# Altium PCB nrf52810_caaa_dcdc.PcbDoc
Units mil, origin at the board's own origin, x right, y up, seen from the top; angles counter-clockwise.
Board outline 374.02 x 344.49 mil, 4 copper layers (Top Layer, Mid-Layer 1, Mid-Layer 2, Bottom Layer), stack 62.97 mil thick; 17 components, 29 nets, 77 pads, 35 vias.
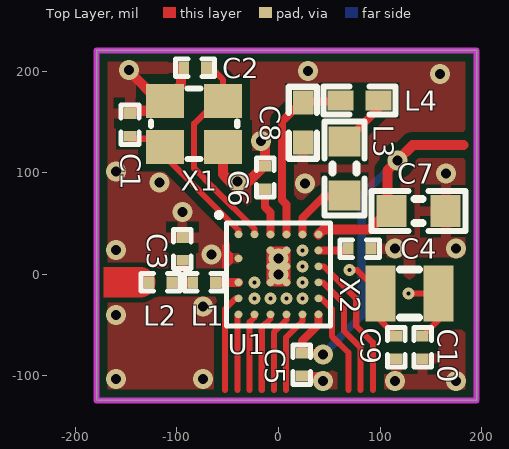
[diagram p0: Top Layer view]
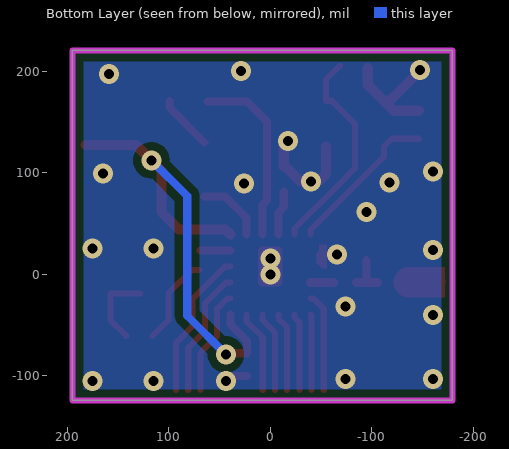
[diagram p1: Bottom Layer view, seen from below]
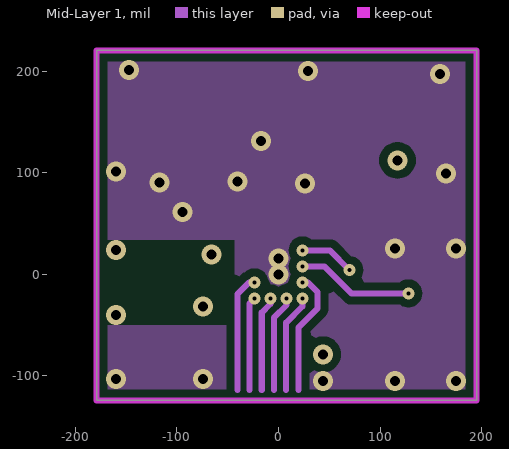
[diagram p2: Mid-Layer 1]
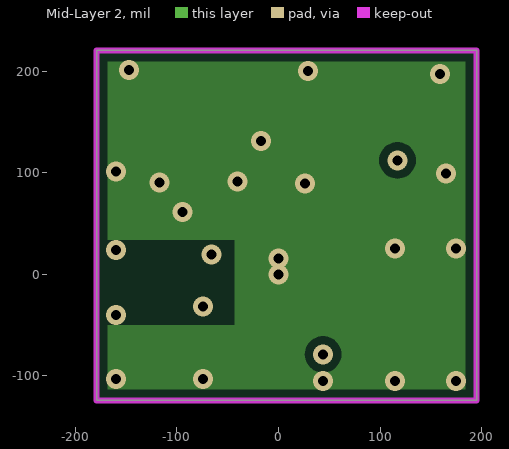
[diagram p3: Mid-Layer 2]
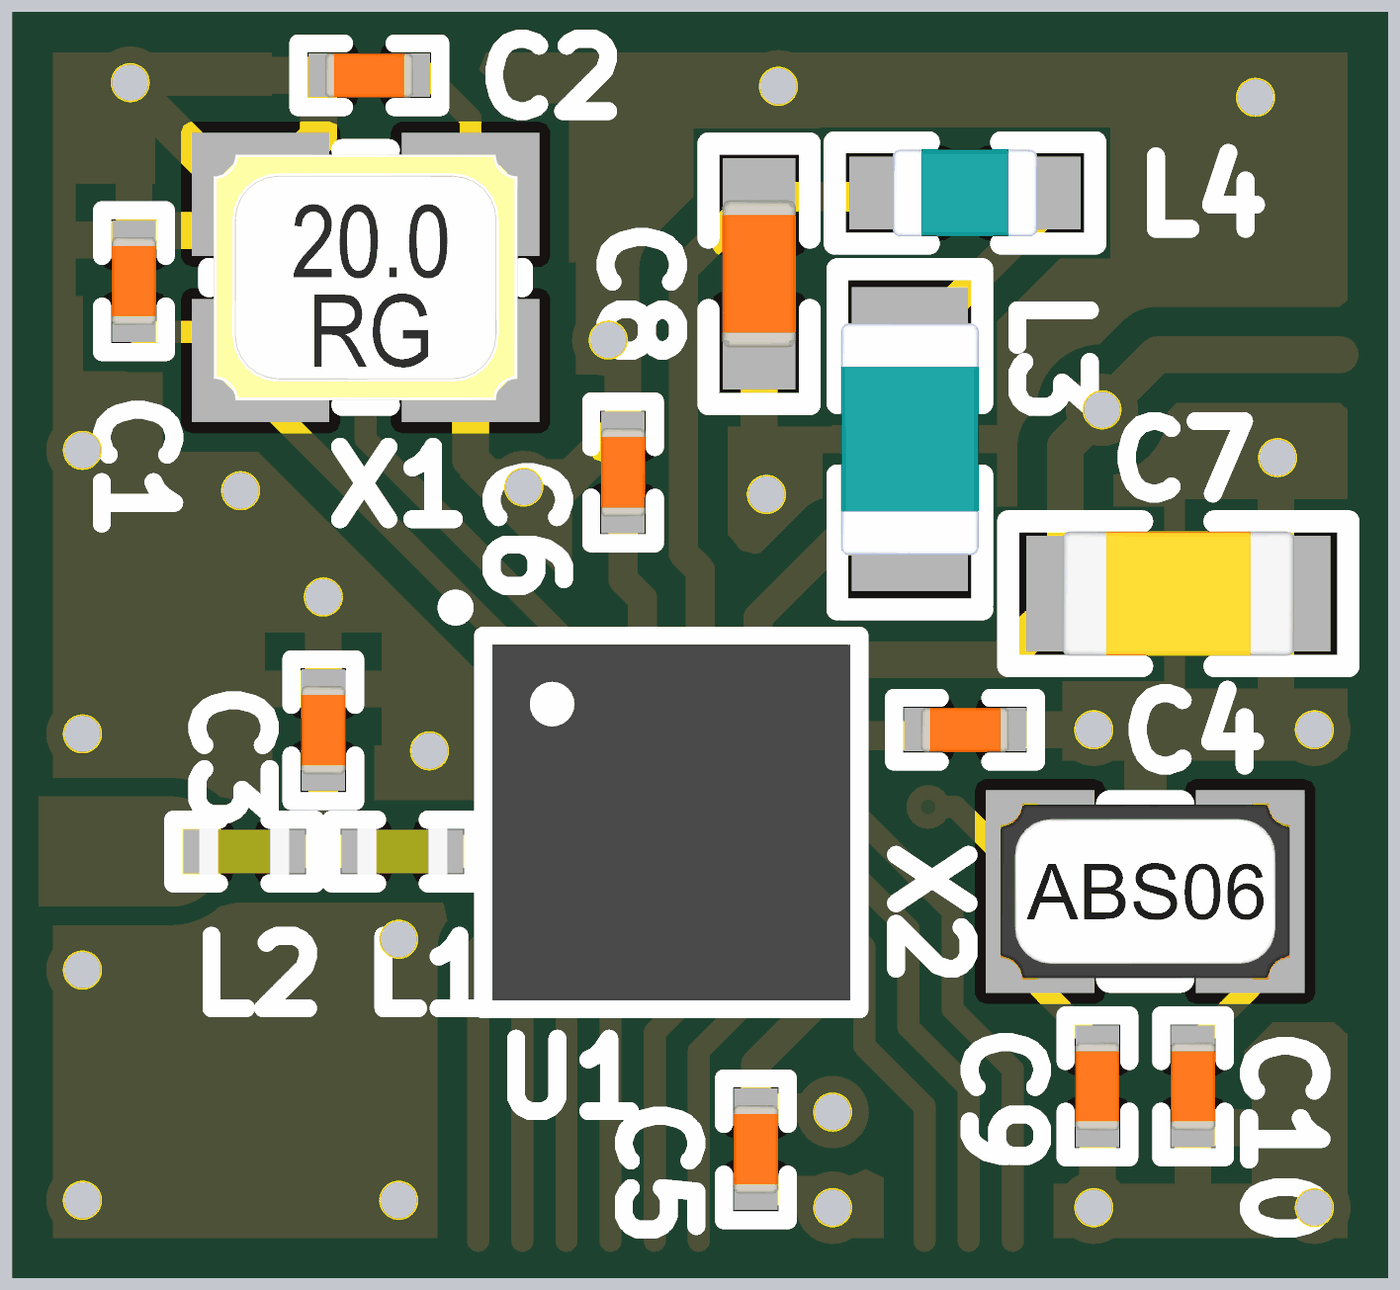
[diagram p4: 3D render of the assembled board from above, using the file's embedded part models]

## Layer stack, top to bottom
Top Solder: solder mask 0.4, Solder Resist, Dk 3.5
Top Layer: signal copper 1.4
Dielectric1: core 9, FR-4, Dk 4.8
Mid-Layer 1: signal copper 1.4
Dielectric2: prepreg 39.3701, FR-4, Dk 4.8
Mid-Layer 2: signal copper 1.4
Dielectric3: core 9, FR-4, Dk 4.8
Bottom Layer: signal copper 1.4
Bottom Solder: solder mask 0.4, Solder Resist, Dk 3.5

## Board outline
-179.13,-124.02 194.88,-124.02 194.88,220.47 -179.13,220.47

## Design rules (kind name [scope] priority, off if disabled: settings)
Clearance Polygon_ANT [(InNamedPolygon('Top_Layer-GND')) or (InNamedPolygon('Bottom_Layer-GND')) vs InNet('RF')] p1: gap=5 ignorepadtopadclearanceinfootprint=FALSE except(0: Arc-Hole Track-Hole SMDPad-Hole THPad-Hole Via-Hole Fill-Hole Poly-Hole Region-Hole Text-Hole)
Clearance Polygon [(InNamedPolygon('Top_Layer-GND')) or (InNamedPolygon('Bottom_Layer-GND')) or (InNamedPolygon('Mid_Layer_1-GND')) or (InNamedPolygon('Mid_Layer_2-GND'))] p2: gap=8 ignorepadtopadclearanceinfootprint=FALSE except(0: Arc-Hole Track-Hole SMDPad-Hole THPad-Hole Via-Hole Fill-Hole Poly-Hole Region-Hole Text-Hole)
Clearance [All] p3: gap=3.94 ignorepadtopadclearanceinfootprint=FALSE
ComponentClearance [All] p1 off: gap=10 collisioncheckmode=3 verticalgap=10 showdistances=FALSE
FabricationTestPointUsage TestPointUsage [All] p1: valid=0 allowmultiple=FALSE
FabricationTestpoint Testpoint [All] p1: side=3 testpointundercomponent=TRUE minsize=40 maxsize=100 preferedsize=60 minholesize=0 maxholesize=40 preferedholesize=32 testpointgrid=1 allowsidetop=TRUE allowsidebottom=TRUE usegrid=TRUE gridtolerance=0.01
Height [All] p1 off: minheight=0 maxheight=1000 prefheight=500
HoleSize [All] p1: absolutevalues=TRUE maxlimit=160 minlimit=3 maxpercent=80.000 minpercent=20.000
HoleToHoleClearance [All] p1 off: gap=3 allowstackedmicrovias=FALSE
MinimumAnnularRing [All] p1 off: minimumring=3.94
PolygonConnect PolygonConnect_1 [isVia and innet(gnd)] p1: connectstyle=Direct reliefconductorwidth=10 reliefentries=4 polygonreliefangle="90 Angle" airgapwidth=10
PolygonConnect [All] p2: connectstyle=Relief reliefconductorwidth=10 reliefentries=4 polygonreliefangle="90 Angle" airgapwidth=10
RoutingVias [All] p1: holewidth=16 width=32 viastyle="Through Hole" minholewidth=3.94 minwidth=9.84 maxholewidth=28 maxwidth=50
SilkToSolderMaskClearance SilkscreenOverComponentPads [IsPad] p1: minsilkscreentomaskgap=10 clearancetoexposedcopper=TRUE
SolderMaskExpansion [All] p1: expansion=3
Width [All] p1: maxlimit=100 minlimit=3 preferedwidth=6 minimp=50.000000 maximp=50.000000 favimp=50.000000
23 further rules are at their usual default settings.

## Components (designator, comment, footprint, x,y, rotation, side; value= is the part's Value field where it differs from the comment)
C1 "12pF" CAPC0603X03L_C -146.13,147.25 r270 top
C2 "12pF" CAPC0603X03L_C -82.13,203.25 r0 top
C3 "1.2pF" CAPC0603X03L_C -94.63,25.12 r270 top
C4 "100nF" CAPC0603X03L_C 79.87,25.25 r0 top
C5 "100nF" CAPC0603X03L_C 23,-88.87 r270 top
C6 "100pF" CAPC0603X03L_C -13.13,95.25 r270 top
C7 "4.7µF" CAPC1608X06L 137.87,62.25 r0 top
C8 "1.0µF" CAPC1005X04L 23.87,149.25 r90 top
C9 "12pF" CAPC0603X03L_C 115.87,-71.75 r90 top
C10 "12pF" CAPC0603X03L_C 141.87,-71.75 r90 top
L1 "2.2nH" INDC0603X03L_C -73.13,-7.87 r180 top
L2 "3.3nH" INDC0603X03L_C -116.13,-7.88 r180 top
L3 "10µH" INDC1608X06L 64.87,104.25 r270 top
L4 "15nH" INDC1005X04L 79.87,171.25 r0 top
U1 "nRF52810-CAAA" BGA33C40P6X6_247X246X50 0,0 r0 top
X1 "32MHz" BT-XTAL_2016 -83.13,148.25 r0 top
X2 "32.768kHz" XTAL_2012 128.87,-18.75 r0 top

## Footprints (in the part's own frame and the unit in brackets; to place one, negate y for a bottom-side part, rotate by r counter-clockwise, add the part's x,y. Pads: shape width x height; smd on the part's side, far side on the other; paste and mask are expansions set on the pad)
BGA33C40P6X6_247X246X50 [mm] "BGA, 33-Leads, Body 2.47x2.46mmx0.50mm, Pitch 0.40mm"
  round 0.194 smd mask+0.05: A1(-1,1) A2(-0.6,1) A3(-0.2,1) A4(0.2,1) A5(0.6,1) A6(1,1) B3(-0.2,0.6) B4(0.2,0.6) B5(0.6,0.6) B6(1,0.6) C1(-1,0.4) D3(-0.2,0.2) D4(0.2,0.2) D5(0.6,0.2) D6(1,0.2) E1(-1,-0.2) E2(-0.6,-0.2) E3(-0.2,-0.2) E4(0.2,-0.2) E5(0.6,-0.2) E6(1,-0.2) F1(-1,-0.6) F2(-0.6,-0.6) F3(-0.2,-0.6) F4(0.2,-0.6) F5(0.6,-0.6) F6(1,-0.6) G1(-1,-1) G2(-0.6,-1) G3(-0.2,-1) G4(0.2,-1) G5(0.6,-1) G6(1,-1)
  silkscreen extent -1.55,-1.29 1.3,1.55, body extent -1.23,-1.23 1.23,1.23, height 0.5
BT-XTAL_2016 [mm] "Crystal 2.0 x 1.6 mm"
  rect 0.95x0.85 smd: 1(-0.725,-0.575) 2(0.725,-0.575) 3(0.725,0.575) 4(-0.725,0.575)
  silkscreen extent -1.08,-0.88 1.08,0.88, body extent -1.05,-0.85 1.05,0.85, height 0.56
CAPC0603X03L_C [mm] "Chip Capacitor, 2-Leads, Body 0.6x0.3mm, IPC High Density"
  rect 0.27x0.3 smd: 1(-0.285,0) 2(0.285,0)
  silkscreen extent -0.49,-0.22 0.49,0.22, body extent -0.3,-0.15 0.31,0.15, height 0.3
CAPC1005X04L [mm] "Chip Capacitor, 2-Leads, Body 1.0x0.5mm, IPC High Density"
  rect 0.6x0.5 smd: 1(-0.5,0) 2(0.5,0)
  silkscreen extent -0.9,-0.35 0.9,0.35, body extent -0.51,-0.25 0.51,0.25, height 0.5
CAPC1608X06L [mm] "Chip Capacitor, 2-Leads, Body 1.6x0.8mm, IPC High Density"
  rect 0.75x0.8 smd: 1(-0.675,0) 2(0.675,0)
  silkscreen extent -1.17,-0.5 1.17,0.5, body extent -0.8,-0.43 0.8,0.43, height 0.8
INDC0603X03L_C [mm] "Chip Inductor, 2-Leads, Body 0.6x0.3mm, IPC High Density"
  rect 0.27x0.3 smd: 1(-0.285,0) 2(0.285,0)
  silkscreen extent -0.49,-0.22 0.49,0.22, body extent -0.31,-0.16 0.31,0.16, height 0.26
INDC1005X04L [mm] "Chip Inductor, 2-Leads, Body 1.0x0.5mm, IPC High Density"
  rect 0.65x0.5 smd: 1(-0.475,0) 2(0.475,0)
  silkscreen extent -0.9,-0.35 0.9,0.35, body extent -0.5,-0.3 0.5,0.3, height 0.5
INDC1608X06L [mm] "Chip Inductor, 2-Leads, Body 1.6x0.8mm, IPC High Density"
  rect 0.75x0.8 smd: 1(-0.675,0) 2(0.675,0)
  silkscreen extent -1.17,-0.5 1.17,0.5, body extent -0.8,-0.48 0.8,0.48, height 0.8
XTAL_2012 [mm] "XTAL SMD 2.0 x 1.2 mm"
  rect 0.75x1.4 smd: 1(-0.725,0) 2(0.725,0)
  silkscreen extent -0.24,-0.6 0.24,0.6, body extent -1,-0.61 1,0.61, height 0.6

## Part data
C1 C2 C9 C10: library part C0201-12p, "Capacitor, NP0, ±2%", Footprint Doc=0201, LatestRevisionDate=2017-11-09, Part Number=C0201-12p, Pin Count=2, Published=2014-11-13, Publisher="Nordic Semiconductor"
C3: library part C0201-1.2p, "Capacitor, NP0, ±5%", Footprint Doc=0201, LatestRevisionDate=2014-11-13, Part Number=C0201-1.2p, Pin Count=2, Published=2014-11-13, Publisher="Nordic Semiconductor"
C4 C5: library part C0201-100n, "Capacitor, X5R, ±10%", Footprint Doc=0201, LatestRevisionDate=2017-11-09, Part Number=C0201-100n, Pin Count=2, Published=2014-11-13, Publisher="Nordic Semiconductor"
C6: library part C0201-100p, "Capacitor, NP0, ±2%", Footprint Doc=0201, LatestRevisionDate=2017-11-09, Part Number=C0201-100p, Pin Count=2, Published=2014-11-13, Publisher="Nordic Semiconductor"
C7: library part C0603-4µ7, "Capacitor, X5R, ±10%", Footprint Doc=0603, LatestRevisionDate=2009-11-23, Part Number=C0603-4µ7, Pin Count=2, Published=2009-05-08, Publisher="Nordic Semiconductor"
C8: library part C0402-1µ0, "Capacitor, X5R, ±5%", Footprint Doc=0402, LatestRevisionDate=2016-08-22, Part Number=C0402-1µ0, Pin Count=2, Published=2009-05-08, Publisher="Nordic Semiconductor"
L1: library part L0201-2n2, "High frequency chip inductor ±5%", Footprint Doc=0201, LatestRevisionDate=2013-04-10, Part Number=L0201-2n2, Pin Count=2, Published=2013-04-10, Publisher="Nordic Semiconductor"
L2: library part L0201-3n3, "High frequency chip inductor ±5%", Footprint Doc=0201, LatestRevisionDate=2013-04-10, Part Number=L0201-3n3, Pin Count=2, Published=2013-04-10, Publisher="Nordic Semiconductor"
L3: library part L0603-10µ, "Chip inductor, IDC,min = 50 mA, ±20%", Footprint Doc=0603, LatestRevisionDate=2012-09-19, Part Number=L0603-10µ, Pin Count=2, Published=2010-02-24, Publisher="Nordic Semiconductor"
L4: library part L0402-15n, "High frequency chip inductor ±10%", Footprint Doc=0402, LatestRevisionDate=2012-09-19, Part Number=L0402-15n, Pin Count=2, Published=2010-07-12, Publisher="Nordic Semiconductor"
U1: "Multi-protocol Bluetooth Low Energy, ANT and 2.4GHz proprietary system-on-chip", Manufacturer="Nordic Semiconductor", Footprint Doc=WLCSP-33, LatestRevisionDate=2017-02-07, Manufacturer Part Number=nRF52810-CAAA, Part Number=nRF52810-CAAA, Pin Count=33, Published=2017-02-01, Publisher="Nordic Semiconductor"
X1: library part XTAL_SMD2016_32MHz_8pF_General, "XTAL SMD 2016, 32MHz, Cl=8pF, Total Tol: ±40ppm", Footprint Doc=XTAL_2016, LatestRevisionDate=2016-08-19, Part Number=XTAL_SMD2016_32MHz_8pF_General, Pin Count=4, Published=2016-08-19, Publisher="Nordic Semiconductor"
X2: library part XTAL_SMD2012_32.768kHz_9pF_General, "XTAL SMD 2012, 32.768kHz, Cl=9pF, Total Tol: ±50ppm", Footprint Doc=XTAL_2012, LatestRevisionDate=2017-01-11, Part Number=XTAL_SMD2012_32.768kHz_9pF_General, Pin Count=2, Published=2016-08-19, Publisher="Nordic Semiconductor"

## Free pads (board coordinates)
  round 19.68 on Mech16: 1(0,15.75) 2(0,0)
  round 11.81 on Mech16: 2(-23.62,-23.62) 2(-23.62,-7.87) 2(-7.87,-23.62) 2(7.87,-23.62) 2(23.62,-23.62) 2(23.62,-7.87) 2(23.62,7.87) 2(23.62,23.62)

## Via types
v1: diameter 19.68, hole 9.84, Top Layer to Bottom Layer, tented both sides, 25 vias
v2: diameter 11.81, hole 3.94, Top Layer to Mid-Layer 1, tented both sides, 10 vias

## Nets (pads, with @x,y where several pads share a name; then routed paths per layer and width w, separated by ;. In a path a pad name is that pad's centre, name@x,y a point inside that pad or via, vN(x,y) a via of type N, cw(c..) or ccw(c..) an arc to the next point about the centre after c; other vN are vias at no path point)
DEC1: C4.1 U1.B6 | length 29.3
  Top Layer w8: U1.B6 C4.1@68.65,23.62
DEC2: C6.2 U1.A3 | length 44.3
  Top Layer w8: C6.2@-13.13,81.47 -13.13,66.25 -7.87,61 U1.A3
DEC4: C8.2 L4.1 U1.A4 | length 179.7
  Top Layer w8: U1.A4 7.87,68.66 3.28,73.25 3.28,150.41 23.13,170.25 L4.1@61.86,170.25
GND: C1.1 C2.1 C3.1 C4.2 C5.2 C6.1 C7.2 C8.1 C9.1 C10.1 U1.B3 U1.B4 U1.C1 U1.D3 U1.D4 U1.E3 U1.E4 X1.2 X1.4 | length 362.3
  Top Layer w8: U1.B3 U1.B4 ; U1.D3@-7.75,7.62 U1.B3@-7.75,23.37 ; U1.E4 U1.E3 U1.D3 U1.D4 ; U1.E4@8,-8.13 8,7.62 U1.B4@8,23.37 ; C5.2 39.22,-100.09 v1(43.87,-104.75)
  Top Layer w10: v1@-147.13,200.25 -117.76,170.89 X1.4 ; C1.1@-146.13,161.03 -121.53,161.03 X1.4 ; C2.1@-95.91,203.25 -95.91,186.65 X1.4 ; X1.2 -54.58,98.71 -47.13,91.25 v1(-40.13,91.25) -29.76,91.25 -14.54,106.47 C6.1 -13.13,127.25 v1(-17.13,131.25)
  other v1: 114.87,-104.75 174.87,-104.75 -160.13,-102.75 -74.13,-102.75 -160.13,-40.14 -74.13,-31.75 0,0 0,15.75 -65.75,19.51 -160.13,24.12 114.87,25.25 174.87,25.25 -94.63,61.34 25.87,89.25 -117.13,90.25 164.87,99.25 -160.13,101.25 158.87,197.25 29.13,200.25 -147.13,201.25
NetC3_2: C3.2 L1.2 L2.1 | length 42.8
  Top Layer w8: -95.13,-7.88 -94.63,-7.38 C3.2
  Top Layer w9: L2.1@-105.38,-7.88 L2.1 -95.13,-7.88 L1.2@-84.6,-7.88
NetL1_1: L1.1 U1.E1 | length 22.5
  Top Layer w9: L1.1 U1.E1
NetL3_1: L3.1 L4.2 | length 54.6
  Top Layer w8: L3.1@65.13,129.95 99.26,164.09 L4.2@99.26,170.38
NetL3_2: L3.2 U1.A5 | length 66.6
  Top Layer w8: U1.A5 23.62,55.75 44.55,76.68 L3.2@65.13,76.68
P0.00/XL1: C9.2 U1.B5 X2.1 | length 142.5
  Top Layer w6: v2(69.87,4.25) 77.33,4.25 X2.1 100.33,-44.98 C9.2
  Mid-Layer 1 w6: v2(23.62,23.62) 50.5,23.62 v2(69.87,4.25)
P0.01/XL2: C10.2 U1.D5 X2.2 | length 193
  Top Layer w6: v2(127.87,-18.75) X2.2 157.42,-44.98 C10.2
  Mid-Layer 1 w6: v2(23.62,7.87) 45.17,7.87 71.79,-18.75 v2(127.87,-18.75)
P0.03/AIN1: U1.D6 | length 146.9
  Top Layer w6: U1.D6 44.64,7.87 76.5,-23.99 76.5,-50.79 92.87,-67.16 92.87,-113.75
P0.04/AIN2: U1.E5 | length 123.1
  Mid-Layer 1 w6: 19.5,-113.75 19.5,-52.49 38.53,-33.46 38.53,-17.45 28.95,-7.87 v2(23.62,-7.87)
P0.05/AIN3: U1.E6 | length 125.4
  Top Layer w6: U1.E6 43.42,-7.87 64.5,-28.96 64.5,-55.76 80.87,-72.13 80.87,-113.75
P0.08: U1.F6 | length 104
  Top Layer w6: U1.F6 42.2,-23.62 52.5,-33.93 52.5,-60.73 68.87,-77.1 68.87,-113.75
P0.11: U1.F5 | length 96.8
  Mid-Layer 1 w6: 7.5,-113.75 7.5,-47.52 23.62,-31.4 v2(23.62,-23.62)
P0.12: U1.G5 | length 81.1
  Top Layer w6: 7.5,-113.75 7.5,-62.07 23.62,-45.94 U1.G5
P0.14: U1.F4 | length 95.3
  Mid-Layer 1 w6: -4.5,-113.75 -4.5,-42.55 7.87,-30.18 v2(7.87,-23.62)
P0.15: U1.G4 | length 79.5
  Top Layer w6: -4.5,-113.75 -4.5,-57.1 7.87,-44.72 U1.G4
P0.16: U1.G3 | length 78
  Top Layer w6: -16.5,-113.75 -16.5,-52.13 -7.87,-43.5 U1.G3
P0.17: U1.F3 | length 93.7
  Mid-Layer 1 w6: -16.5,-113.75 -16.5,-37.58 -7.87,-28.95 v2(-7.87,-23.62)
P0.18: U1.E2 | length 116
  Mid-Layer 1 w6: -40.5,-113.75 -40.5,-19.42 -28.95,-7.87 v2(-23.62,-7.87)
P0.20: U1.G2 | length 76.4
  Top Layer w6: -28.5,-113.75 -28.5,-47.08 -23.62,-42.2 U1.G2
P0.21/R\E\S\E\T\: U1.F2 | length 92.1
  Mid-Layer 1 w6: -28.5,-113.75 -28.5,-28.5 v2(-23.62,-23.62)
RF: L2.2 | length 21
  Top Layer w30: -157.13,-7.88 -136.13,-7.88
SWDCLK: U1.G1 | length 74.8
  Top Layer w6: -40.5,-113.75 -40.5,-40.5 U1.G1
SWDIO: U1.F1 | length 97.2
  Top Layer w6: -52.5,-113.75 -52.5,-33.93 -42.2,-23.62 U1.F1
VDD_NRF: C5.1 C7.1 U1.A6 U1.G6 | length 492.1
  Top Layer w8: C5.1 46.78,-77.65 v1@47.87,-78.75 ; C5.1@23,-75.09 23,-65.62 39.37,-49.25 U1.G6
  Top Layer w10: U1.A6 44.25,44.25 90.13,44.25 107.13,61.25 107.13,102.25 v1(117.13,112.25) 132.13,127.25 181.87,127.25
  Bottom Layer w8: v1(43.87,-78.75) 81.87,-40.75 81.87,77 v1(117.13,112.25)
XC1: C1.2 U1.A1 X1.1 | length 153.9
  Top Layer w6: C1.2@-146.13,133.47 -119.53,133.47 X1.1 -111.67,115.8 -39.37,43.5 U1.A1
XC2: C2.2 U1.A2 X1.3 | length 211.5
  Top Layer w6: C2.2@-68.35,205.25 -54.58,191.49 X1.3 -60.49,170.89 -83.13,148.25 -83.13,104.25 -63.63,84.75 ; -63.63,84.72 -23.62,44.72 U1.A2

## Polygon pours and split planes (outlines as drawn)
GND on Bottom Layer "Bottom_Layer-GND" (solid, remove dead copper, pour order 8): -227.88,-183.75 -227.88,236.25 263.12,236.25 263.12,-183.75
GND on Mid-Layer 2 "Mid_Layer_2-GND" (solid, remove dead copper, pour order 7): -227.88,-183.75 -227.88,236.25 263.12,236.25 263.12,-183.75
GND on Mid-Layer 1 "Mid_Layer_1-GND" (solid, remove dead copper, pour order 6): -227.88,-183.75 -227.88,236.25 263.12,236.25 263.12,-183.75
GND on Top Layer "Top_Layer-GND" (solid, remove dead copper, pour order 5): -227.88,-183.75 -227.88,236.25 263.12,236.25 263.12,-183.75

## Keep-outs
Keep-Out Layer:
  the board outline again, w6

## Other copper
Top Layer:
  rectangle net RF: -172.1,-22.88 -157.13,7.12
  region net GND: -48.09,29.46 -48.09,23.22 -45.13,20.25 -45.13,11.25 -50.35,6.03 -55.49,6.03 -55.49,28.61 -56.13,29.25
  pour cut-out: -37.13,39.25 -37.13,-5.75 -22.13,-5.75 -22.13,39.25
Mid-Layer 1:
  pour cut-out: -43.13,-50 -202.88,-50 -202.88,34.25 -43.13,34.25
Mid-Layer 2:
  pour cut-out: -43.13,-50 -202.88,-50 -202.88,34.25 -43.13,34.25

## Silkscreen, mask and mechanical layers (free items; w line width, h text height)
Mechanical 1:
  the board outline again, w6

## Dimensions
194.88,220.47 to 194.88,-124.02 on Mechanical 3
-179.13,-124.02 to 194.88,-124.02 on Mechanical 3